# Altium PCB Adder.PcbDoc
Units mil, origin at the board's own origin, x right, y up, seen from the top; angles counter-clockwise.
Board outline 1660 x 2440.94 mil, 2 copper layers (Top Layer, Bottom Layer); 25 components, 13 nets, 77 pads, 8 vias.
Unrouted connection lines stored in the file: 23.
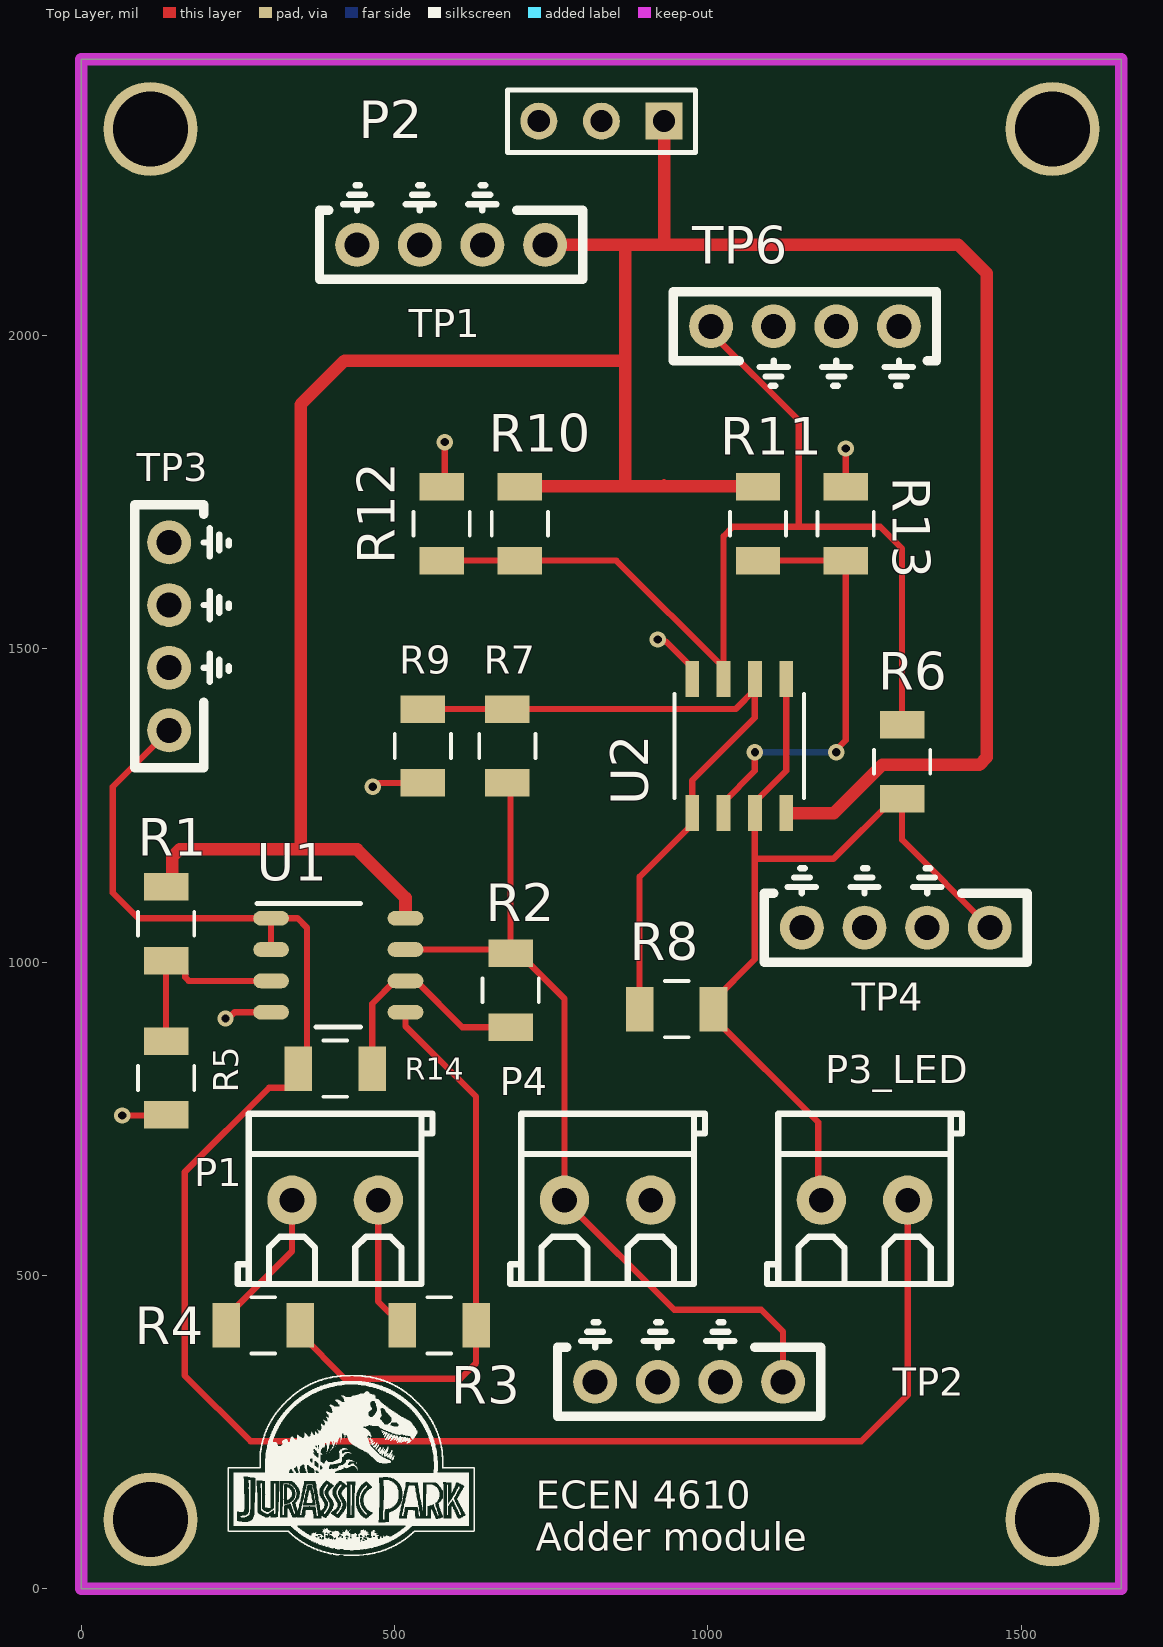
[diagram p0: Top Layer view]
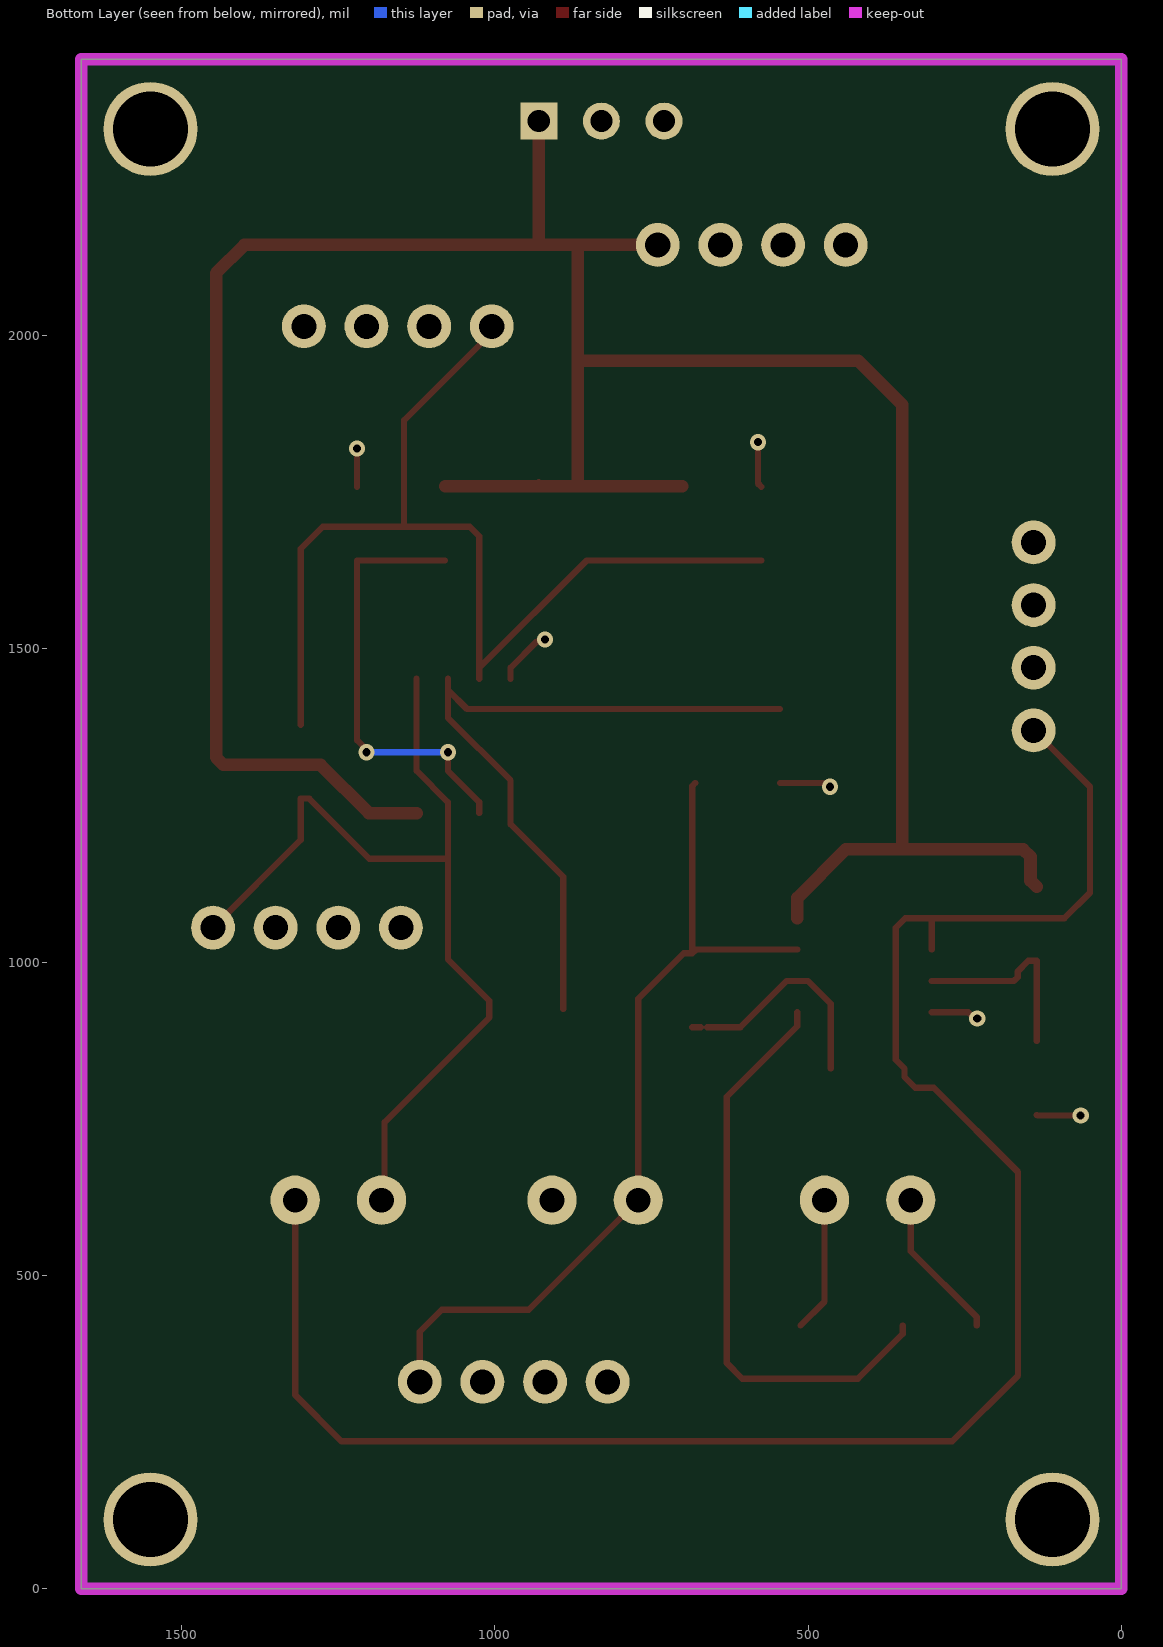
[diagram p1: Bottom Layer view, seen from below]
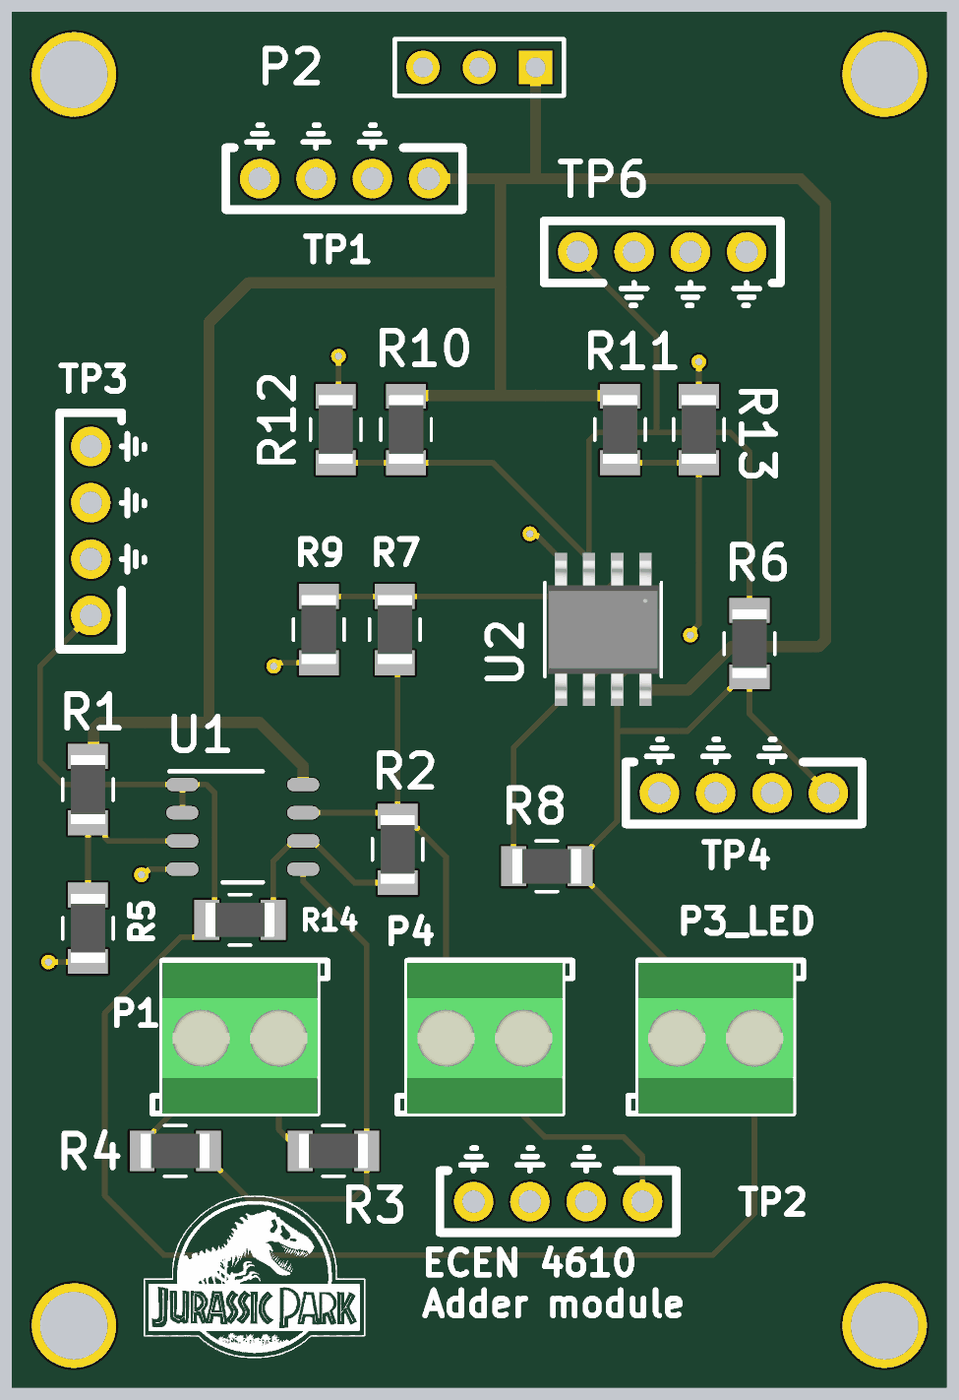
[diagram p2: 3D render of the assembled board from above, using the file's embedded part models]

## Layer stack, top to bottom
Top Solder: solder mask 0.4, Solder Resist, Dk 3.5
Top Layer: signal copper 1.4
Dielectric 1: dielectric 12.6, FR-4, Dk 4.8
Bottom Layer: signal copper 1.4
Bottom Solder: solder mask 0.4, Solder Resist, Dk 3.5

## Board outline
0,0 0,2440.94 1660,2440.94 1660,0

## Design rules (kind name [scope] priority, off if disabled: settings)
Clearance [All] p1: gap=10 ignorepadtopadclearanceinfootprint=FALSE
PlaneClearance [All] p1: clearance=10
PlaneConnect [All] p1: planeconnectstyle=Direct reliefexpansion=20 reliefentries=4 reliefconductorwidth=10 reliefairgap=10
PolygonConnect [All] p1: connectstyle=Direct reliefconductorwidth=10 reliefentries=4 polygonreliefangle="90 Angle" airgapwidth=10
RoutingVias [All] p1: holewidth=28 width=50 viastyle="Through Hole" minholewidth=28 minwidth=50 maxholewidth=28 maxwidth=50
SolderMaskExpansion [All] p1: expansion=4 istentingtop=FALSE
SupplyNets "Schematic Supply Nets_2" [InNet('GND')] p1: voltage=0.000
SupplyNets "Schematic Supply Nets_1" [InNet('+12')] p2: voltage=0.000
SupplyNets "Schematic Supply Nets" [InNet('+24')] p3: voltage=0.000
Width [All] p1: maxlimit=100 minlimit=10 preferedwidth=10
28 further rules are at their usual default settings.

## Components (designator, comment, footprint, x,y, rotation, side; value= is the part's Value field where it differs from the comment)
P1 "2P Screw Terminal Block" "P_Terminal block 3.5mm-pitch" 405,620 r0 top
P2 "Header 3" HDR1X3 930,2342.52 r180 top
P3_LED "2P Screw Terminal Block" "P_Terminal block 3.5mm-pitch" 1250,620 r0 top
P4 "2P Screw Terminal Block" "P_Terminal block 3.5mm-pitch" 840,620 r0 top
R1 "10k" 1206_Passive_Resitor 135,1061 r90 top value=10KOhm
R2 "100KOhm" 1206_Passive_Resitor 685,955 r90 top
R3 "100KOhm" 1206_Passive_Resitor 571,420 r0 top
R4 "100KOhm" 1206_Passive_Resitor 290,420 r0 top
R5 "10k" 1206_Passive_Resitor 135,815 r90 top value=10KOhm
R6 "1k" 1206_Passive_Resitor 1310,1320 r90 top value="330K Ohm"
R7 "1k" 1206_Passive_Resitor 680,1345 r90 top value="1K Ohm"
R8 "1k" 1206_Passive_Resitor 950,925 r0 top value="330K Ohm"
R9 "1k" 1206_Passive_Resitor 545,1345 r90 top value="1K Ohm"
R10 "52k" 1206_Passive_Resitor 700,1700 r90 top value="52K Ohm"
R11 "1M" 1206_Passive_Resitor 1080,1700 r90 top value="1M Ohm"
R12 "1k" 1206_Passive_Resitor 575,1700 r270 top value="50K Ohm"
R13 "10k" 1206_Passive_Resitor 1220,1700 r270 top value=10KOhm
R14 "100KOhm" 1206_Passive_Resitor 405,830 r0 top
TP1 "10x Probe TP" TP10x_Probe 590,2145 r180 top
TP2 "10x Probe TP" TP10x_Probe 970,330 r180 top
TP3 "10x Probe TP" TP10x_Probe 140,1520 r90 top
TP4 "10x Probe TP" TP10x_Probe 1300,1055 r180 top
TP6 "10x Probe TP" TP10x_Probe 1155,2015 r0 top
U1 "OPA2196IDR" D0008A_N 410,995 r0 top
U2 "LM393DR" D8 1050,1345 r270 top

## Footprints (in the part's own frame and the unit in brackets; to place one, negate y for a bottom-side part, rotate by r counter-clockwise, add the part's x,y. Pads: shape width x height; smd on the part's side, far side on the other; paste and mask are expansions set on the pad)
1206_Passive_Resitor [mil]
  rect 44x71 smd: 1(-59,0) 2(59,0)
  silkscreen extent -19,-45 19,45, body extent -61,-31 61,31, height 26
D8 [mil]
  rect 57.28x21.97 smd paste+0 mask+0: 1(-107.14,75) 2(-107.14,25) 3(-107.14,-25) 4(-107.14,-75) 5(107.14,-75) 6(107.14,-25) 7(107.14,25) 8(107.14,75)
  silkscreen extent -84,-104 84,104, body extent -122,-99 122,99, height 69
D0008A_N [mm]
  oval 1.45x0.6 smd paste+0 mask+0.051: 1(-2.725,1.905) 2(-2.725,0.635) 3(-2.725,-0.635) 4(-2.725,-1.905) 5(2.725,-1.905) 6(2.725,-0.635) 7(2.725,0.635) 8(2.725,1.905)
  silkscreen extent -3.3,-2.5 0.9,2.5
HDR1X3 [mm] "Connector; Header; 3 Position"
  rect 1.5x1.5 hole 0.9: 1(0,0)
  round 1.5 hole 0.9: 2(2.54,0) 3(5.08,0)
  silkscreen extent -1.27,-1.27 6.35,1.27
"P_Terminal block 3.5mm-pitch" [mm]
  round 2 hole 1: 1(-1.75,0) 2(1.75,0)
  silkscreen extent -3.95,-3.4 3.95,3.5, body extent -3.5,-3.4 3.5,3.4, height 8.4
TP10x_Probe [mil] "Small Probs footprint"
  round 70 hole 40: 1(-150,0) 2(-50,0) 2(50,0) 2(150,0)
  silkscreen extent -210,-95 210,55

## Part data
P1 P3_LED P4: library part "P_Terminal block", "Green Straight pin 3.5mm  pitch; P=3.5mm  Screw terminal ROHS", LCSC Part#=C474892, Manufacturer="Cixi Kefa Elec", MFR Part #=KF350-3.5-2P, Datasheet=https://datasheet.lcsc.com/lcsc/2001160007_Cixi-Kefa-Elec-KF350-3-5-2P_C474892.pdf
P2: "Header, 3-Pin", LatestRevisionDate=17-Jul-2002, LatestRevisionNote="Re-released for DXP Platform.", Publisher="Altium Limited"
R1 R5 R13: library part R_10KOhm_1206, "10 kOhms ±5% 0.25W, 1/4W Chip Resistor 1206 (3216 Metric) Automotive AEC-Q200 Thick Film", LCSC Part#=C17902, MFR Part #=RMCF1206FT10K0, Digikey Link=https://www.digikey.com/en/products/detail/stackpole-electronics-inc/RMCF1206FT10K0/1759669, Type=Basic
R2 R3 R4 R14: library part R_100KOhm_1206, "100kΩ ±1% 0.25W ±100ppm/℃ 1206 Chip Resistor - Surface Mount RoHS", LCSC Part#=C17900, MFR Part #=1206W4F1003T5E, Datasheet=https://datasheet.lcsc.com/lcsc/1810301421_UNI-ROYAL-Uniroyal-Elec-1206W4F1003T5E_C17900.pdf, Type=Basic
R6 R7 R8 R9 R12: library part R_1K_1206, "CHIP RESISTOR - SURFACE MOUNT 1KOHMS ±1% 1/4W 1206 ROHS", LCSC Part#=C4410, MFR Part #=RNCP1206FTD1K00CT, Digikey Link=https://www.digikey.com/product-detail/en/RNCP1206FTD1K00/RNCP1206FTD1K00CT-ND/2240675/?itemSeq=304982373, Type=Basic
R10: library part R_1K_1206, "CHIP RESISTOR - SURFACE MOUNT 52KOHMS ±1% 1/4W 1206 ROHS", LCSC Part#=C4410, MFR Part #=RNCP1206FTD1K00CT, Digikey Link=https://www.digikey.com/product-detail/en/RNCP1206FTD1K00/RNCP1206FTD1K00CT-ND/2240675/?itemSeq=304982373, Type=Basic
R11: library part R_1M_1206, "CHIP RESISTOR - SURFACE MOUNT 1MOHMS ±1% 1/4W 1206 ROHS", LCSC Part#=C17927, MFR Part #=RMCF1206JT1M00, Digikey Link=https://www.digikey.com/product-detail/en/RMCF1206JT1M00/RMCF1206JT1M00CT-ND/1942830/?itemSeq=304982358, Type=Basic
TP1 TP2 TP3 TP4 TP6: library part TP_10x_Probe, "Test Point 300 mil centers"
U1: "Dual, 36-V, low power, all-purpose amplifier with mux-friendly input 8-SOIC -40 to 125", Manufacturer_Name="Texas Instruments", Copyright="Copyright (C) 2026 Ultra Librarian. All rights reserved.", Datasheet=https://www.ti.com/lit/gpn/opa2196, Manufacturer_Part_Number=OPA2196IDR, RefDes=RefDes, Type=TYPE
U2: "Dual differential comparator, commercial grade 8-SOIC 0 to 70", Manufacturer_Name="Texas Instruments", Copyright="Copyright (C) 2025 Ultra Librarian. All rights reserved.", Manufacturer_Part_Number=LM393DR, RefDes=RefDes, Type=Type

## Free pads (board coordinates)
  round 150 hole 120: 2(110,110) 2(110,2330) 2(1550,110) 2(1550,2330)

## Via types
v1: diameter 26, hole 13, Top Layer to Bottom Layer, 8 vias

## Nets (pads, with @x,y where several pads share a name; then routed paths per layer and width w, separated by ;. In a path a pad name is that pad's centre, name@x,y a point inside that pad or via, vN(x,y) a via of type N, cw(c..) or ccw(c..) an arc to the next point about the centre after c; other vN are vias at no path point)
1IN+: R6.2 R10.1 R12.2 TP6.1 U2.3 | length 1713.5
  Top Layer w10: R12.2 R10.1 853.8,1641 U2.3@1025,1469.8 ; TP6.1 1005,2005 1145,1865 1145,1695 ; U2.3 U2.3@1025,1469.8 ; R6.2 1310,1660 1275,1695 1145,1695 ; U2.3@1025,1469.8 1025,1680 1040,1695 1145,1695
1IN-: R7.2 R8.1 R9.2 U2.2 U2.5 | length 1163.6
  Top Layer w10: R9.2 R7.2 1044.52,1404 1075,1434.48 U2.2 1075,1390 975,1290 U2.5 975,1220.2 891,1136.2 R8.1
2IN-: R11.1 R13.2 U2.6 | length 700.1
  Top Layer w10: U2.6 1025,1255.52 1075,1305.52 v1(1075,1335) ; R11.1 R13.2 1220,1354.33 1205,1339.33 v1(1205,1335)
  Bottom Layer w10: v1(1075,1335) v1(1205,1335)
2OUT: P3_LED.1 R6.1 R8.2 TP4.1 U2.1 U2.7 | length 1483.2
  Top Layer w10: U2.1 1125,1305.52 1075,1255.52 U2.7 1075,1165 ; P3_LED.1@1176.1,625 1176.1,744.4 1009,911.5 R8.2 1009,938.5 1075,1004.5 1075,1165 ; TP4.1 1310,1195 R6.1 1296.5,1261 1200.5,1165 1075,1165
+12: P3_LED.2 R14.1 TP3.1 U1.1 U1.2 | length 3031.7
  Top Layer w10: TP3.1 50,1280 50,1110.86 90.86,1070 U1.1 ; U1.2 U1.1 ; P3_LED.2 1318.9,308.9 1245,235 270,235 165,340 165,665 299.5,799.5 329,799.5 346,816.5 R14.1 360,844 360,1055 345,1070 U1.1
+24: P2.1 R1.2 R10.2 R11.2 TP1.1 U1.8 U2.8 | length 4577.6
  Top Layer w10: R10.2 R10.2@701,1760 ; 930,1765.86 935.86,1760 ; R11.2@1079,1760 R11.2
  Top Layer w20: R1.2 145,1130 145,1168.28 156.72,1180 350,1180 ; U1.8 517.28,1102.72 440,1180 350,1180 ; R10.2@701,1760 865,1760 ; TP1.1 867.72,2145 ; P2.1@930,2342.68 930,2145 ; R11.2@1079,1760 935.86,1760 865,1760 ; U2.8 1201.08,1237.86 1278.22,1315 1433.28,1315 1445,1326.72 1445,2100 1400,2145 930,2145 ; 350,1180 350,1890 420,1960 867.72,1960 ; 865,1760 867.72,1762.72 867.72,1960 ; 867.72,1960 867.72,2145 ; 867.72,2145 930,2145
GND: P2.2 P2.3 P4.2 R5.1 R9.1 R12.1 R13.1 TP1.2 TP2.2 TP3.2 TP4.2 TP6.2 U1.4 U2.4 | length 455.2
  Top Layer w10: v1(65,755) 134,755 R5.1 ; v1(230,910) 234.33,910 244.33,920 U1.4 ; v1(465,1280) 469.33,1280 475.33,1286 R9.1 ; R12.1 580,1764 v1(580,1830) ; v1(920,1515) 923.06,1511.94 932.86,1511.94 975,1469.8 U2.4 ; R13.1 v1(1220,1820)
NetP1_1: P1.1 R4.1 | length 243.5
  Top Layer w10: R4.1 231,433.5 336.1,538.6 P1.1
NetP1_2: P1.2 R3.1 | length 215.8
  Top Layer w10: P1.2 473.9,458.1 R3.1
NetR1_1: R1.1 R5.2 U1.3 | length 314.3
  Top Layer w10: R5.2 R1.1 148.5,1002 165.5,985 165.5,975.86 171.36,970 U1.3
NetR2_1: R2.1 R14.2 U1.6 | length 359.7
  Top Layer w10: R14.2 464,933.45 500.55,970 U1.6 534.02,970 608.02,896 R2.1@661,896 ; R2.1@671.5,896 R2.1
NetR3_2: R3.2 R4.2 U1.5 | length 941.2
  Top Layer w10: R4.2 349,406.5 420.5,335 605,335 630,360 R3.2 630,785 517.28,897.72 U1.5
Vout: P4.1 R2.2 R7.1 TP2.1 U1.7 | length 1397.7
  Top Layer w10: U1.7 679,1020 R2.2 ; R7.1 685,1281 R2.2 ; TP2.1 1120,410 1085,445 946.1,445 P4.1 771.1,941.4 698.5,1014 R2.2

## Keep-outs
Keep-Out Layer:
  the board outline again, w20

## Silkscreen, mask and mechanical layers (free items; w line width, h text height)
Top Overlay:
  drawing of 54 lines, arcs and shapes, not listed
  text "ECEN 4610 / Adder module" at 725,60 h45

## Text inside footprints (layer, text, board x,y; h text height)
U2: Mechanical 13 "*" at 1095.5,1421 h50 r270